# EAGLE board ctrlm_v1dual (EAGLE 5.10)
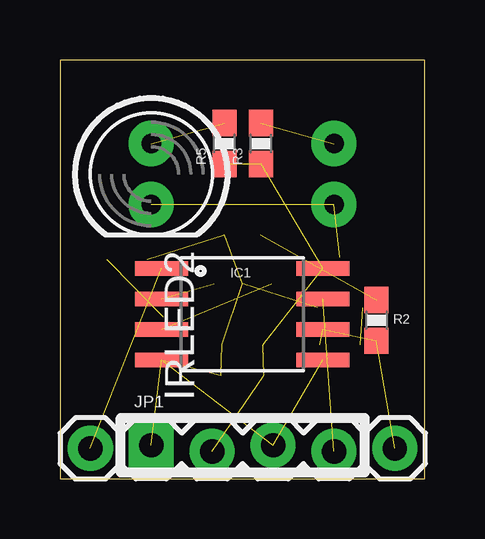
[diagram p0: board, top side]
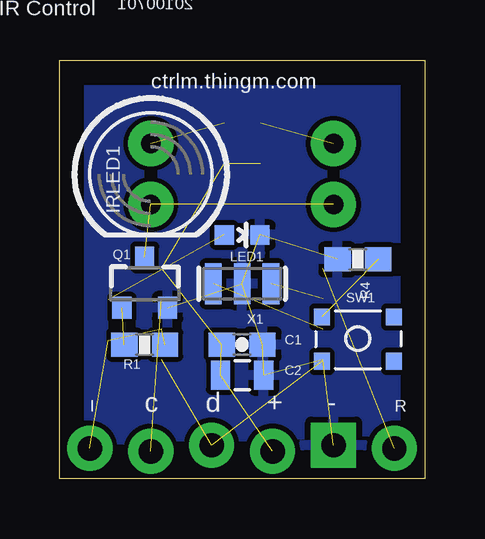
[diagram p1: board, bottom side, seen from below]

Size 15.22 x 17.45 mm. Coordinates in mm from the lower left corner, seen from the top.
Outline: 0,0 15.22,0 15.22,17.45 0,17.45 0,0
Copper layers (1*16): Top 0.035mm / dielectric 1.5mm / Bottom 0.035mm
Design rules "default *": minimum track width 10mil, minimum drill 24mil, track to track 8mil, track to pad 8mil, pad to pad 8mil, via to via 8mil, smd to smd 8mil, copper to edge 40mil, drill to drill 8mil, minimum pad ring 10mil, minimum via ring 8mil, stop-mask expansion 4mil, vias tented up to drill 24mil, thermal gap 10mil

## Footprints (pad centres in the part's own frame; a part is rotated, then mirrored left to right if it is on the bottom)
0603-CAP = smd 1.1 x 1: 1 -0.85,0; 2 0.85,0
0805 = smd 0.8 x 1.2: 1 -0.9,0; 2 0.9,0
1X01 = drill 1.016 pad 1.88 round: 1 0,0
SO08-EIAJ = smd 0.61 x 2.21: 1 -1.905,-3.378; 2 -0.635,-3.378; 3 0.635,-3.378; 4 1.905,-3.378; 5 1.905,3.353; 6 0.635,3.353; 7 -0.635,3.353; 8 -1.905,3.353
LED5MM = drill 0.813 pad 1.88 round: A -1.27,0; K 1.27,0
1X04_LOCK = drill 1.016 pad 1.88 square: 1 0,0.127 | drill 1.016 pad 1.88 round: 2 2.54,-0.127; 3 5.08,0.127; 4 7.62,-0.127
LED-0603 = smd 0.8 x 0.8: A 0,-0.75; C 0,0.75
SOT23-3 = smd 0.8 x 0.9: 1 -0.95,-1; 2 0.95,-1; 3 0,1.1
0603-RES = smd 1.1 x 1: 1 -0.85,0; 2 0.85,0
TACT_SWITCH_KMT_NANO = smd 0.65 x 0.7: P1@1 -1.5,-0.95; P1@2 1.5,-0.95; P2@1 -1.5,0.9; P2@2 1.5,0.9
RESONATOR-SMD = smd 0.7 x 1.7: 1 -1.2,0; 2 0,0; 3 1.2,0

## Placement (x,y rotation side)
C1  100n  [0603-CAP]  7.62,5.59 0 bottom
C2  1uF  [0805]  7.62,4.32 0 bottom
I  M01PTH  [1X01]  13.97,1.27 0 top
IC1  ATTINY85-20SSU  [SO08-EIAJ]  7.62,6.86 270 top
IRLED1  EL-IR333-A  [LED5MM]  11.43,12.7 270 bottom
IRLED2  EL-IR333-A  [LED5MM]  3.81,12.7 270 top
JP1  blinkm  [1X04_LOCK]  3.81,1.27 0 top
LED1  green  [LED-0603]  7.62,10.16 270 bottom
Q1  2N2222  [SOT23-3]  11.68,8.13 0 bottom
R  M01PTH  [1X01]  1.27,1.27 0 top
R1  1k  [0603-RES]  11.68,5.59 0 bottom
R2  1k  [0603-RES]  13.21,6.6 270 top
R3  100  [0603-RES]  8.38,13.97 90 top
R4  1k  [0603-RES]  2.79,9.14 180 bottom
R5  100  [0603-RES]  6.86,13.97 90 top
SW1  TACT_SWITCH_KMT_NANO  [TACT_SWITCH_KMT_NANO]  2.79,5.84 0 bottom
X1  CSTCE8M00G55-R0  [RESONATOR-SMD]  7.62,8.13 180 bottom

## Library data of the parts
C1 C2 I IRLED1 IRLED2 JP1 LED1 Q1 R R1-R5 = SparkFun-20091103
IC1 SW1 = todstuff
X1 = SparkFun-20090330

## Nets
GND: C1.2 C2.2 IC1.4 JP1.1 LED1.C Q1.2 R4.2 X1.2
MISO: I.1 IC1.6 R1.2 R2.2
N$1: LED1.A R2.1
N$2: Q1.1 R1.1
N$3: IRLED1.K IRLED2.K Q1.3
N$4: IC1.2 X1.1
N$5: IC1.3 X1.3
N$6: IRLED2.A R5.2
N$7: IRLED1.A R3.2
N$8: R4.1 SW1.P2@1
RESET: IC1.1 R.1
SCL: IC1.7 JP1.4
SDA: IC1.5 JP1.3 SW1.P1@1
VCC: C1.1 C2.1 IC1.8 JP1.2 R3.1 R5.1

## Tracks (layer width: path | path; a pad name or v marks a point on that pad's centre or on a via)
GND  (7 unrouted)
  pour Bottom: 0,17.78 20.32,17.78 20.32,-1.27 0,-1.27
MISO  (3 unrouted)
N$1  (1 unrouted)
N$2  (1 unrouted)
N$3  (2 unrouted)
N$4  (1 unrouted)
N$5  (1 unrouted)
N$6  (1 unrouted)
N$7  (1 unrouted)
N$8  (1 unrouted)
RESET  (1 unrouted)
SCL  (1 unrouted)
SDA  (2 unrouted)
VCC  (5 unrouted)

## Text on the board
tPlace: freem_v1
bPlace: 20100701 | BlinkM | IR Control | ctrlm.thingm.com | - | + | d | c